# Altium PCB real_watch_1v1_main.PcbDoc
Units mil, origin at the board's own origin, x right, y up, seen from the top; angles counter-clockwise.
Board outline 1574.8 x 1574.8 mil, 2 copper layers (Top Layer, Bottom Layer), stack 22.8 mil thick; 41 components, 38 nets, 196 pads, 101 vias.
Unrouted connection lines stored in the file: 10.
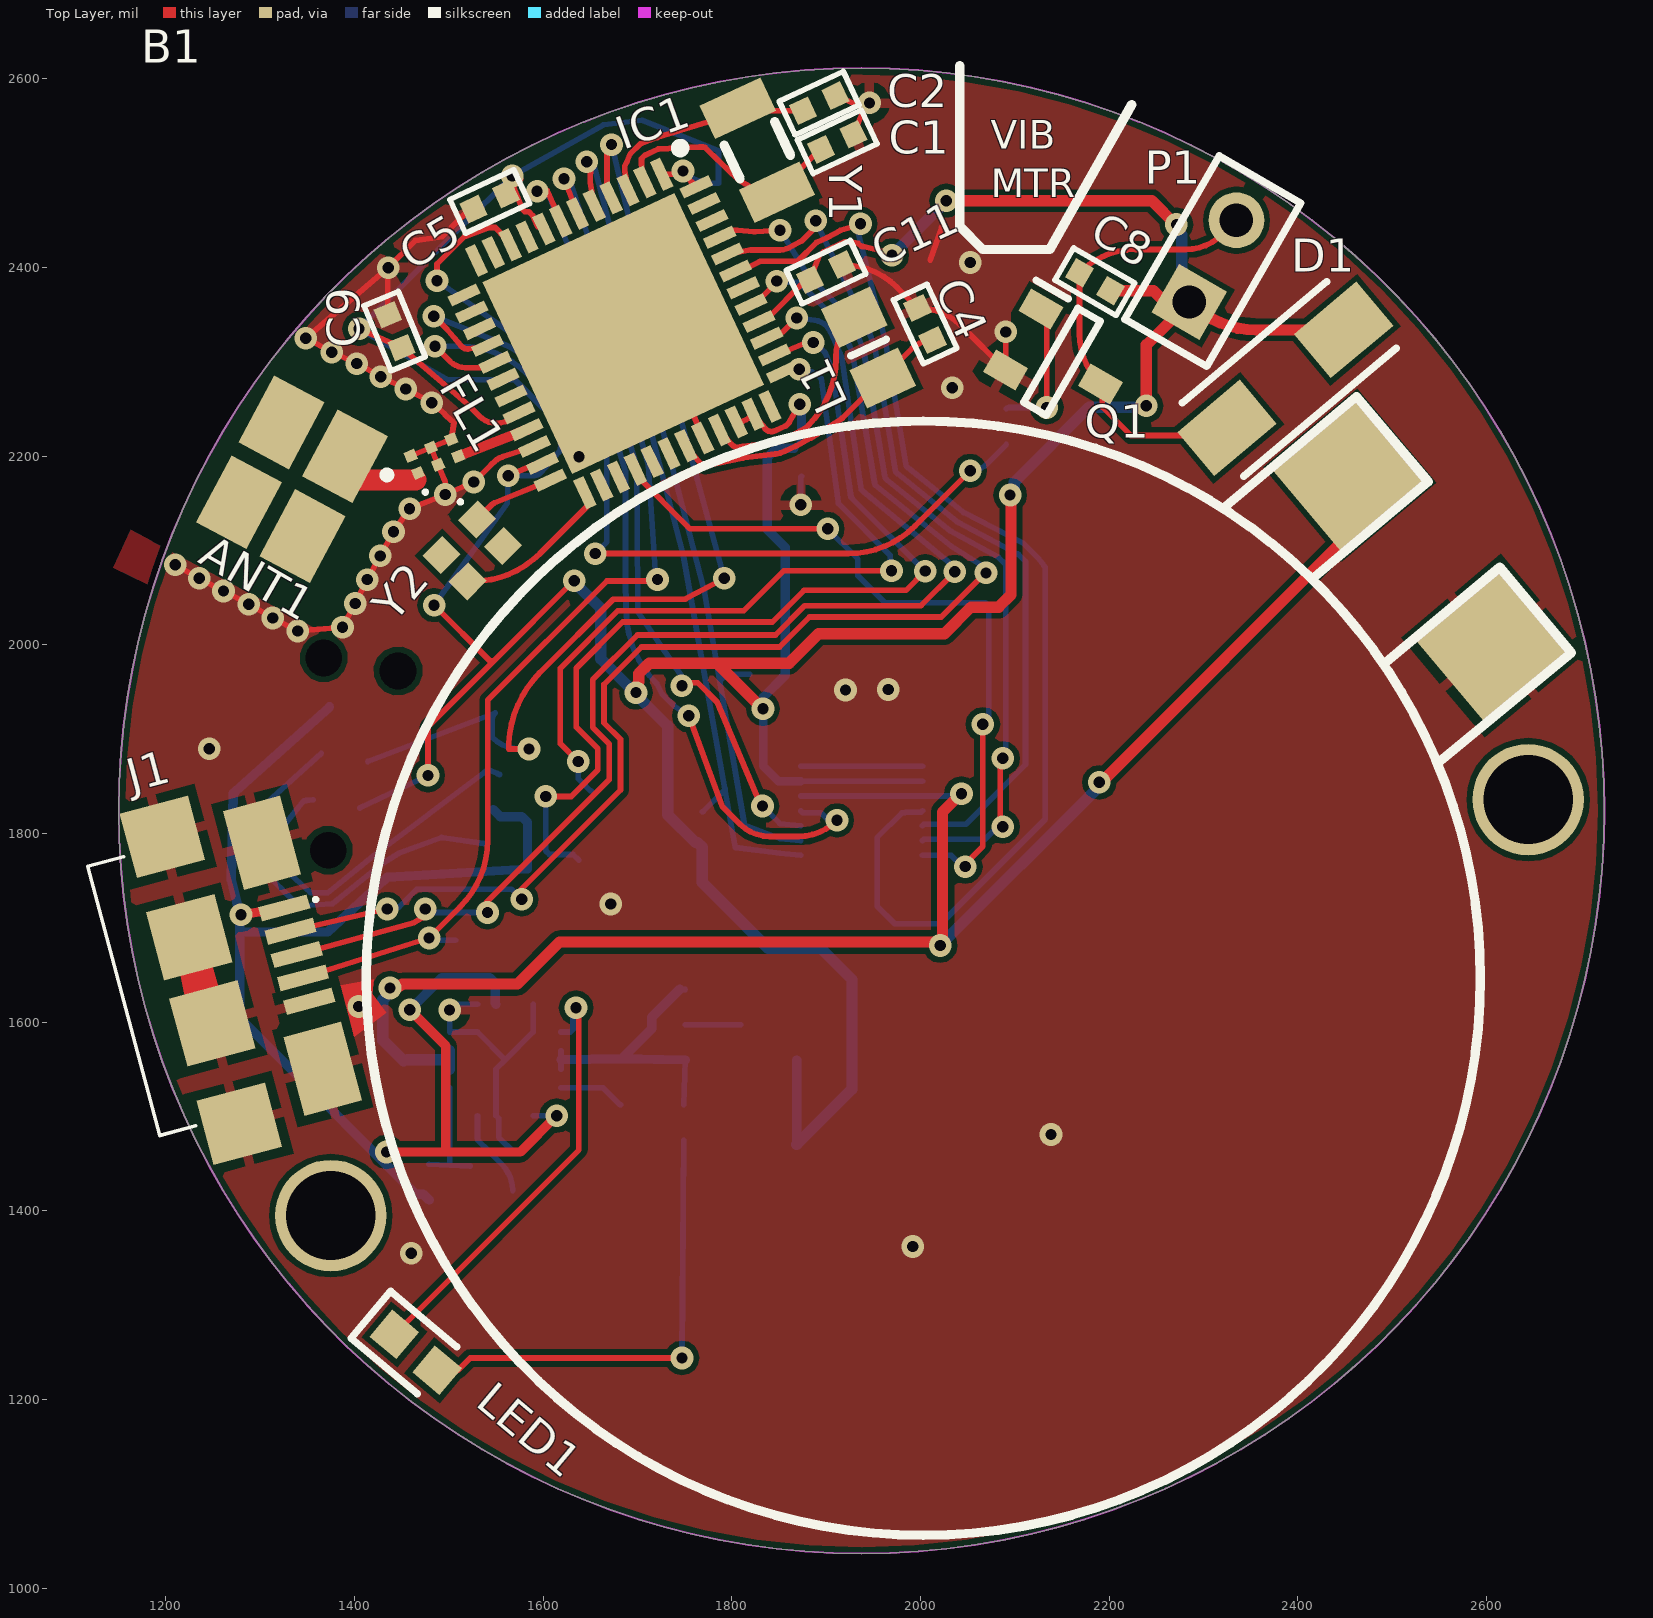
[diagram p0: Top Layer view]
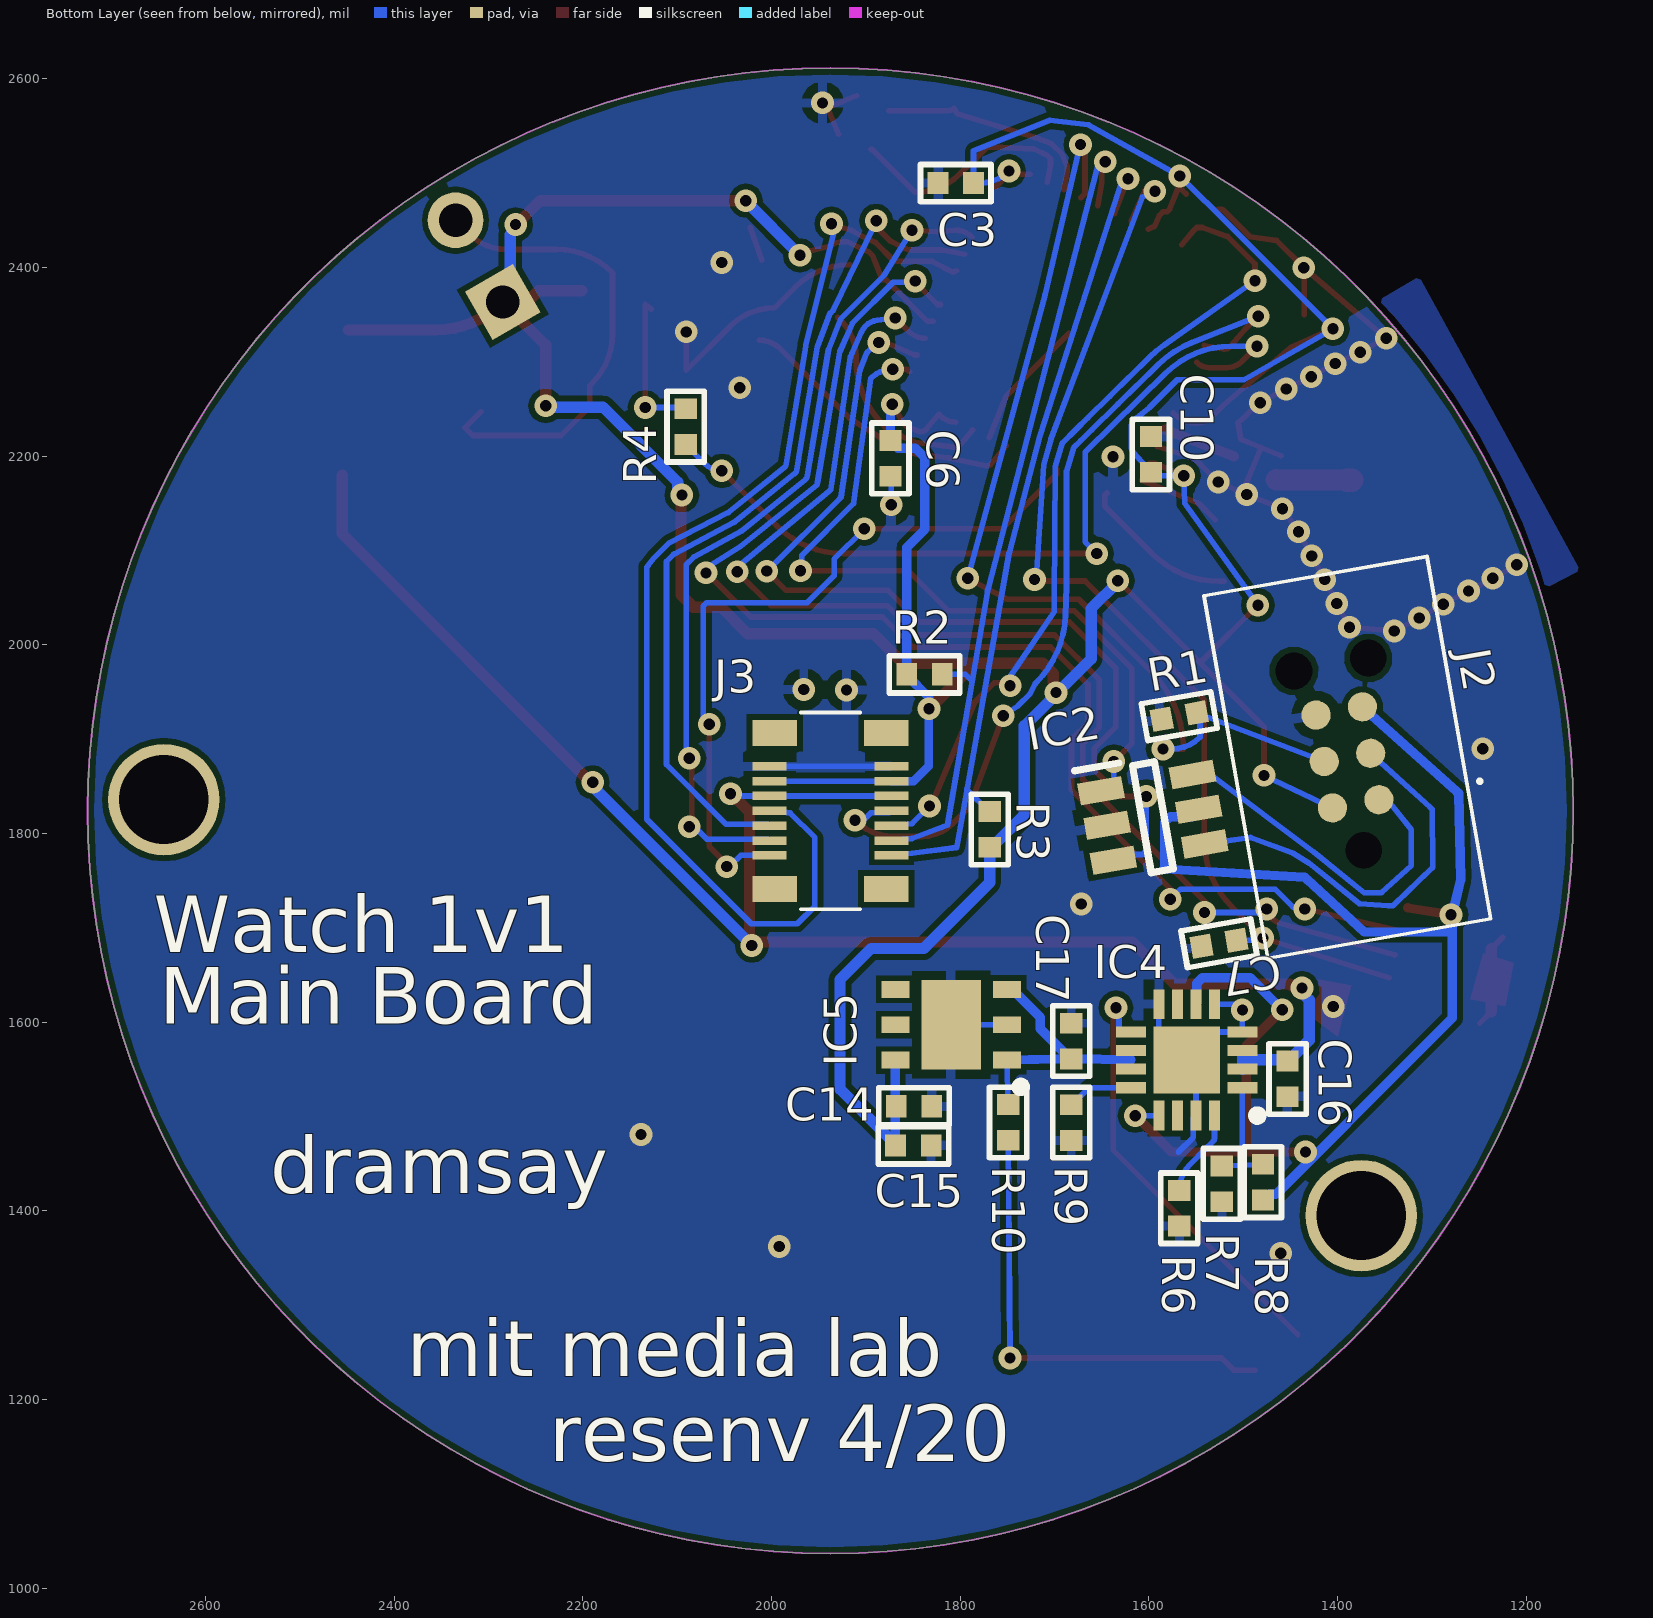
[diagram p1: Bottom Layer view, seen from below]
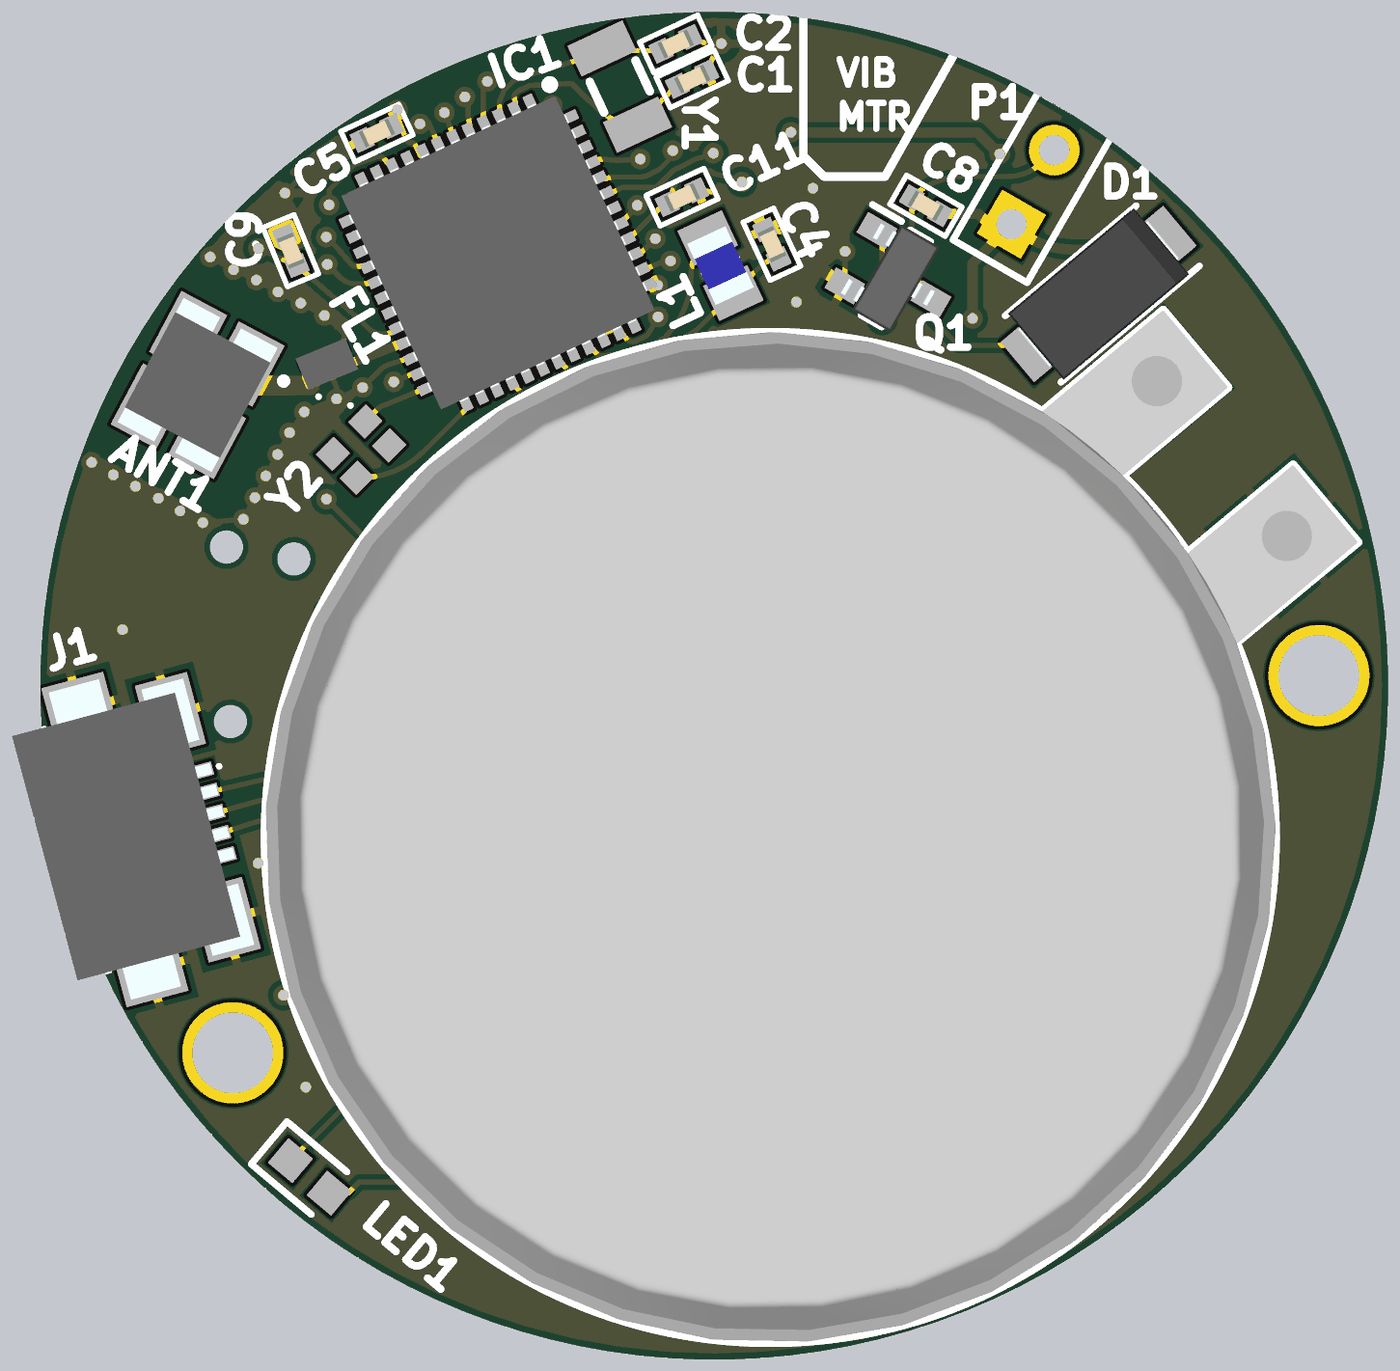
[diagram p2: 3D render of the assembled board from above, using the file's embedded part models]
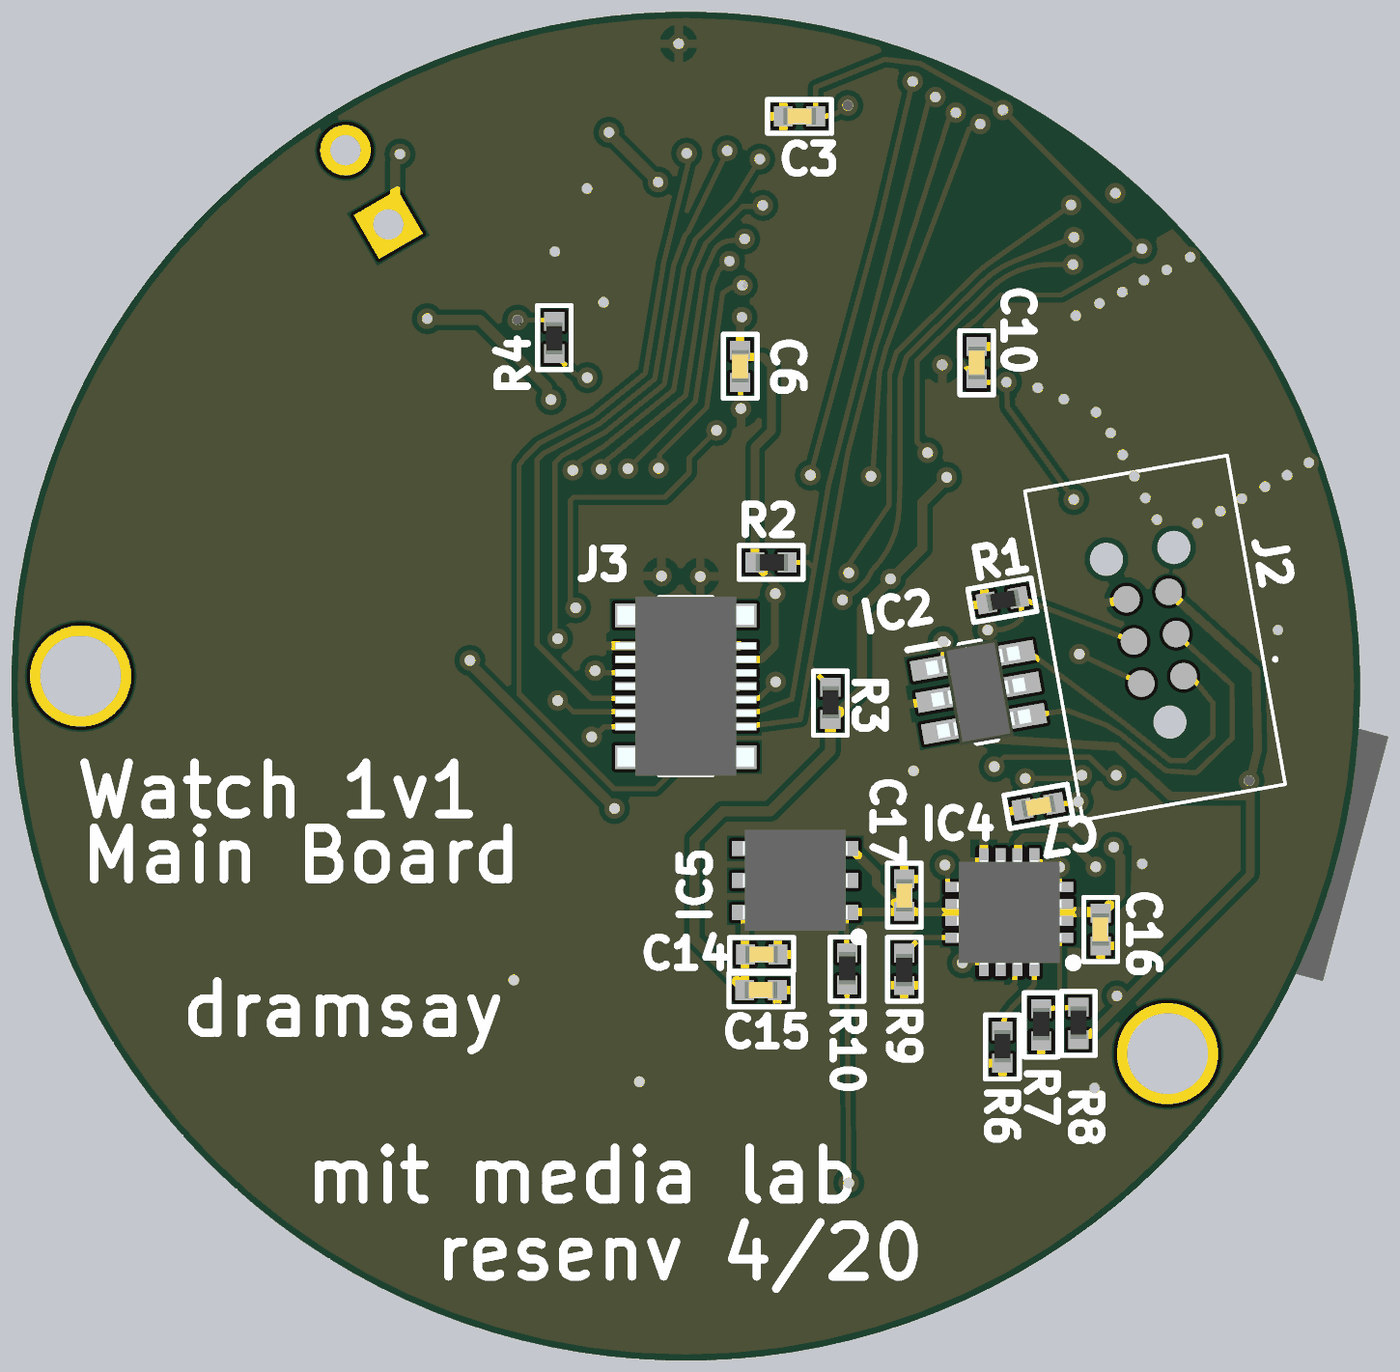
[diagram p3: 3D render of the assembled board from below, using the file's embedded part models]

## Layer stack, top to bottom
Top Solder: solder mask 0.4, Solder Resist, Dk 3.5
Top Layer: signal copper 1.4
Dielectric 1: dielectric 20, FR-4, Dk 4.8
Bottom Layer: signal copper 1.4
Bottom Solder: solder mask 0.4, Solder Resist, Dk 3.5

## Board outline
1937.65,1036.61 cw(c1937.65,1824.01) 1150.25,1824.01 cw(c1937.65,1824.01) 1937.65,2611.41 cw(c1937.65,1824.01) 2725.05,1824.01 cw(c1937.65,1824.01)

## Design rules (kind name [scope] priority, off if disabled: settings)
Clearance [All] p1: gap=6 ignorepadtopadclearanceinfootprint=FALSE except(0: Arc-Hole Track-Hole SMDPad-Hole THPad-Hole Via-Hole Fill-Hole Poly-Hole Region-Hole Text-Hole)
ComponentClearance [All] p1: gap=6 collisioncheckmode=3 verticalgap=6 showdistances=FALSE
MinimumSolderMaskSliver [All] p1: minsoldermaskwidth=6
PolygonConnect [All] p1: connectstyle=Direct reliefconductorwidth=10 reliefentries=4 polygonreliefangle="90 Angle" airgapwidth=10
RoutingVias [All] p1: holewidth=28 width=50 viastyle="Through Hole" minholewidth=28 minwidth=50 maxholewidth=28 maxwidth=50
SilkToSilkClearance [All] p1: silktosilkclearance=0
SilkToSolderMaskClearance [IsPad] p1: minsilkscreentomaskgap=3 clearancetoexposedcopper=TRUE
SolderMaskExpansion [All] p1: expansion=4 istentingtop=FALSE
Width [All] p1: maxlimit=100 minlimit=6 preferedwidth=6 minimp=50.000000 maximp=50.000000 favimp=50.000000
26 further rules are at their usual default settings.

## Classes and differential pairs
component class main_board_power: B1 C14 C15 C16 C17 IC2 IC3 IC4 IC5 J1 J2 LED1 R6 R7 R8 R9 R10
component class main_board_mcu: ANT1 C1 C2 C3 C4 C5 C6 C7 C8 C9 C10 C11 D1 FL1 IC1 J3 L1 P1 Q1 R1 R2 R3 R4 Y1 Y2

## Components (designator, comment, footprint, x,y, rotation, side; value= is the part's Value field where it differs from the comment)
ANT1 "0479480001" 0479480001 1333.94,2175.5 r332 top
B1 "300 mAh lipo" RJD3048ST1 2003.13,1646.66 r130 top locked
C1 "15pF" 0402C 1911.89,2533.13 r25 top
C2 "15pF" 0402C 1892.67,2574.16 r25 top
C3 "0.10µF" 0402C 1804.82,2489.42 r0 bottom
C4 "4.7µF" 0402C 2005,2340 r115 top
C5 "0.10µF" 0402C 1543.43,2469.83 r205 top
C6 "0.10µF" 0402C 1874,2197.67 r270 bottom
C7 "0.10µF" 0402C 1525.77,1683.7 r350 bottom
C8 "Cap" 0402C 2185,2385 r330 top value=1uF
C9 "0.10µF" 0402C 1442.77,2332.46 r112.5 top
C10 "0.10µF" 0402C 1597.87,2201.77 r90 bottom
C11 "100pF" 0402C 1900,2395 r25 top
C14 "Cap" 0402C 1849.1,1510.82 r180 bottom value=4.7uF
C15 "Cap" 0402C 1849.7,1469.32 r180 bottom value=10nF
C16 "Cap" 0402C 1453.1,1539.87 r270 bottom value=10uF
C17 "Cap" 0402C 1682.4,1579.92 r90 bottom value=10uF
D1 "STTH112A" DIOM5126X265N 2386.83,2281.88 r220 top
FL1 "MLPF-WB55-01E3" MLPFWB5501E3 1485,2200 r112.5 top
IC1 "STM32WB55CGU6" QFN50P700X700X65-49N-D 1685,2330 r295 top
IC2 "USBLC6-2SC6" SOT95P280X145-6N 1595.83,1817.13 r170 bottom
IC4 "BQ24075TRGTR" QFN50P300X300X100-17N-D 1560,1560 r0 bottom
IC5 "MAX4837ETT33BD3+T" SON95P300X300X80-7N 1809.73,1597.25 r0 bottom
J1 "ZX62-B-5PA(33)" ZX62B5PA33 1264.8,1651.75 r285 top
J2 "TC2030-CTX-NL" TC2030MCPNL10 1381.83,1882.03 r80 bottom
J3 "AXT514124" AXT514124 1937.65,1824.01 r90 bottom locked
L1 "LBR2012T100K" INDC2012X145N 1945,2315 r295 top
LED1 "150060VS75000" LEDC1608X80N 1465,1250 r320 top
P1 "To Vibration Motor" HDR1X2 2285,2363.4 r60 top
Q1 "MMBT2222A" SOT95P240X120-3N 2150,2300 r330 top
R1 "100k" 0402R 1567.88,1924.44 r170 bottom
R2 "10k" 0402R 1837.97,1968.64 r180 bottom
R3 "10k" 0402R 1768.75,1804.26 r90 bottom
R4 "1k" 0402R 2091.15,2231.2 r270 bottom
R6 "750" 0402R 1567.86,1402.72 r90 bottom
R7 "50k" 0402R 1522.72,1428.61 r90 bottom
R8 "200k" 0402R 1479.17,1430.34 r90 bottom
R9 "1.62k" 0402R 1682.4,1493.51 r270 bottom
R10 "1.5k" 0402R 1749.29,1493.69 r90 bottom
Y1 "NX3215SA-32.768K-STD-MUA-8" NX3215SA 1827.24,2524.26 r115 top
Y2 "XRCGB32M000F1H01R0" XRCGB32M000F1H01R0 1525,2100 r225 top

## Footprints (in the part's own frame and the unit in brackets; to place one, negate y for a bottom-side part, rotate by r counter-clockwise, add the part's x,y. Pads: shape width x height; smd on the part's side, far side on the other; paste and mask are expansions set on the pad)
0402C [mm]
  rect 0.559x0.6 smd: 1(-0.48,0) 2(0.48,0)
  silkscreen extent -0.95,-0.5 0.95,0.5, body extent -0.48,-0.25 0.48,0.25, height 0.5
0402R [mm]
  rect 0.559x0.6 smd: 1(-0.48,0) 2(0.48,0)
  silkscreen extent -0.95,-0.5 0.95,0.5, body extent -0.46,-0.25 0.5,0.25, height 0.3
0479480001 [mm]
  rect 1.54x2.045 smd: 1(0.965,1.218) SP1(-0.965,1.218) SP2(-0.965,-1.218) SP3(0.965,-1.218)
  silkscreen extent 2.1,1.2 2.3,1.4, body extent -1.6,-2.09 1.6,2.09, height 4.1
AXT514124 [mm]
  rect 0.23x0.92 smd: 1(-1.2,-1.64) 2(-1.2,1.64) 3(-0.8,-1.64) 4(-0.8,1.64) 5(-0.4,-1.64) 6(-0.4,1.64) 7(0,-1.64) 8(0,1.64) 9(0.4,-1.64) 10(0.4,1.64) 11(0.8,-1.64) 12(0.8,1.64) 13(1.2,-1.64) 14(1.2,1.64)
  rect 0.7x1.2 smd: MP1(-2.1,-1.5) MP2(-2.1,1.5) MP3(2.1,-1.5) MP4(2.1,1.5)
  silkscreen extent -2.65,-0.8 2.65,0.8, body extent -2.65,-2.08 2.65,2.08, height 1.27
DIOM5126X265N [mm]
  rect 2.2x1.55 smd: 1(-2.05,0) 2(2.05,0)
  silkscreen extent -2.82,-1.29 2.54,1.29, body extent -2.54,-1.29 2.54,1.29, height 2.65
HDR1X2 [mm] "Connector; Header; 2 Position"
  rect 1.5x1.5 hole 0.9: 1(0,0)
  round 1.5 hole 0.9: 2(2.54,0)
  silkscreen extent -1.27,-1.27 3.81,1.27
INDC2012X145N [mm]
  rect 1.15x1.45 smd: 1(-0.9,0) 2(0.9,0)
  silkscreen extent 0,-0.52 0,0.52, body extent -1,-0.63 1,0.63, height 1.45
LEDC1608X80N [mm]
  rect 0.95x0.95 smd: 1(-0.75,0) 2(0.75,0)
  silkscreen extent -1.58,-0.82 0.75,0.83
MLPFWB5501E3 [mm]
  rect 0.3x0.3 smd: 1(-0.25,0.587) 2(-0.25,0) 3(-0.25,-0.587) 4(0.25,-0.587) 5(0.25,0) 6(0.25,0.587)
  silkscreen extent -0.85,0.55 -0.75,0.65, body extent -0.5,-0.8 0.5,0.8, height 0.8
NX3215SA [mm]
  rect 1x1.8 smd: 1(-1.25,0) 2(1.25,0)
  silkscreen extent -0.5,-0.75 0.5,0.75
QFN50P300X300X100-17N-D [mm]
  rect 0.8x0.3 smd: 1(-1.5,0.75) 2(-1.5,0.25) 3(-1.5,-0.25) 4(-1.5,-0.75) 9(1.5,-0.75) 10(1.5,-0.25) 11(1.5,0.25) 12(1.5,0.75)
  rect 0.3x0.8 smd: 5(-0.75,-1.5) 6(-0.25,-1.5) 7(0.25,-1.5) 8(0.75,-1.5) 13(0.75,1.5) 14(0.25,1.5) 15(-0.25,1.5) 16(-0.75,1.5)
  rect 1.8x1.8 smd: 17(0,0)
  silkscreen extent -2.02,1.38 -1.77,1.62, body extent -1.55,-1.55 1.55,1.55, height 1
QFN50P700X700X65-49N-D [mm]
  rect 0.85x0.3 smd: 1(-3.45,2.75) 2(-3.45,2.25) 3(-3.45,1.75) 4(-3.45,1.25) 5(-3.45,0.75) 6(-3.45,0.25) 7(-3.45,-0.25) 8(-3.45,-0.75) 9(-3.45,-1.25) 10(-3.45,-1.75) 11(-3.45,-2.25) 12(-3.45,-2.75) 25(3.45,-2.75) 26(3.45,-2.25) 27(3.45,-1.75) 28(3.45,-1.25) 29(3.45,-0.75) 30(3.45,-0.25) 31(3.45,0.25) 32(3.45,0.75) 33(3.45,1.25) 34(3.45,1.75) 35(3.45,2.25) 36(3.45,2.75)
  rect 0.3x0.85 smd: 13(-2.75,-3.45) 14(-2.25,-3.45) 15(-1.75,-3.45) 16(-1.25,-3.45) 17(-0.75,-3.45) 18(-0.25,-3.45) 19(0.25,-3.45) 20(0.75,-3.45) 21(1.25,-3.45) 22(1.75,-3.45) 23(2.25,-3.45) 24(2.75,-3.45) 37(2.75,3.45) 38(2.25,3.45) 39(1.75,3.45) 40(1.25,3.45) 41(0.75,3.45) 42(0.25,3.45) 43(-0.25,3.45) 44(-0.75,3.45) 45(-1.25,3.45) 46(-1.75,3.45) 47(-2.25,3.45) 48(-2.75,3.45)
  rect 5.7x5.7 smd: 49(0,0)
  silkscreen extent -4,3.38 -3.75,3.62, body extent -3.55,-3.55 3.55,3.55, height 0.65
RJD3048ST1 [mm] "Illinois Capacitor 300mAh Lipo Battery"
  rect 3x3 smd: Neg(-3,-17.5) Pos(3,-17.5)
  silkscreen extent -15,-19 15,15, body extent -15,-19 15,15, height 4.8
SON95P300X300X80-7N [mm]
  rect 0.75x0.45 smd: 1(-1.5,0.95) 2(-1.5,0) 3(-1.5,-0.95) 4(1.5,-0.95) 5(1.5,0) 6(1.5,0.95)
  rect 1.6x2.4 smd: 7(0,0)
  silkscreen extent -2,1.55 -1.75,1.8, body extent -1.55,-1.5 1.55,1.5, height 0.8
SOT95P240X120-3N [mm]
  rect 1x0.7 smd: 1(-1.2,0.95) 2(-1.2,-0.95) 3(1.2,0)
  silkscreen extent -1.7,-1.46 0.35,1.55, body extent -1.2,-1.46 1.2,1.46, height 1.2
SOT95P280X145-6N [mm]
  rect 1.2x0.6 smd: 1(-1.25,0.95) 2(-1.25,0) 3(-1.25,-0.95) 4(1.25,-0.95) 5(1.25,0) 6(1.25,0.95)
  silkscreen extent -1.85,-1.46 0.3,1.6, body extent -1.4,-1.46 1.4,1.46, height 1.45
TC2030MCPNL10 [mm]
  round 0.787 smd: 1(-1.27,-0.434) 2(-1.27,0.836) 3(0,-0.434) 4(0,0.836) 5(1.27,-0.434) 6(1.27,0.836)
  round 0.495 hole 0.991 unplated: 7(-2.54,0.201) 8(2.54,1.217) 9(2.54,-0.815)
  silkscreen extent -4.95,-3.25 4.95,3.25
XRCGB32M000F1H01R0 [mm]
  rect 0.75x0.7 smd: 1(-0.675,-0.5) 2(0.675,-0.5) 3(0.675,0.5) 4(-0.675,0.5)
  silkscreen extent -0.75,-1.2 -0.65,-1.1
ZX62B5PA33 [mm]
  rect 0.4x1.35 smd: 1(-1.3,1.95) 2(-0.65,1.95) 3(0,1.95) 4(0.65,1.95) 5(1.3,1.95)
  rect 2.2x1.6 smd: 6(-3.15,1.825) 7(3.15,1.825)
  rect 1.8x1.9 smd: 8(-4,-0.725) 11(4,-0.725)
  rect 1.9x1.9 smd: 9(-1.2,-0.725) 10(1.2,-0.725)
  silkscreen extent -3.75,-2.88 3.75,2.87, body extent -4.72,-2.88 4.72,2.59, height 2.9

## Part data
ANT1: "Antenna", Manufacturer_Name=Molex, Datasheet Link=https://www.molex.com/pdm_docs/sd/479480001_sd.pdf, Height=4mm, Manufacturer_Part_Number=0479480001
B1: library part RJD3048ST1, "Illinois Capacitor 300mAh Lipo Battery"
C1 C2: library part GCM1555C1H150JA16D, "CAP CER 15PF 50V NP0 0402", Digi-Key Part Number=490-11147-1-ND, Manufacturer="Murata Electronics North America", Operating Temperature="-55°C ~ 125°C", Package / Case="0402 (1005 Metric)", Ratings=AEC-Q200, Temperature Coefficient="C0G, NP0", Tolerance=±5%, Voltage=50V, @ qty=0, Applications=Automotive, Datasheets=http://www.murata.com/~/media/webrenewal/support/library/catalog/products/capacitor/mlcc/c03e.ashx, Factory Stock=0, Features=-, Height - Seated (Max)=-, Image=//media.digikey.com/Renders/Murata%20Renders/ZRB-SERIES-0402.jpg, Lead Spacing=-, Lead Style=-, Minimum Quantity=1, Mounting Type="Surface Mount, MLCC", Packaging="Cut Tape (CT)", Part Number=GCM1555C1H150JA16D, Part Status=Active, Quantity Available=6185, Series=GCM, Size / Dimension="0.039\" L x 0.020\" W (1.00mm x 0.50mm)", Thickness (Max)="0.022\" (0.55mm)", Unit Price (USD)=0.1
C3 C5 C6 C7 C9 C10: library part GCM155R71C104KA55D, "CAP CER 0.1UF 16V X7R 0402", Digi-Key Part Number=490-4759-1-ND, Manufacturer="Murata Electronics North America", Operating Temperature="-55°C ~ 125°C", Package / Case="0402 (1005 Metric)", Ratings=AEC-Q200, Temperature Coefficient=X7R, Tolerance=±10%, Voltage=16V, @ qty=0, Applications=Automotive, Datasheets=http://www.murata.com/~/media/webrenewal/support/library/catalog/products/capacitor/mlcc/c03e.ashx, Factory Stock=0, Features=-, Height - Seated (Max)=-, Image=//media.digikey.com/Renders/Murata%20Renders/ZRB-SERIES-0402.jpg, Lead Spacing=-, Lead Style=-, Minimum Quantity=1, Mounting Type="Surface Mount, MLCC", Packaging="Cut Tape (CT)", Part Number=GCM155R71C104KA55D, Part Status=Active, Quantity Available=734194, Series=GCM, Size / Dimension="0.039\" L x 0.020\" W (1.00mm x 0.50mm)", Thickness (Max)="0.022\" (0.55mm)", Unit Price (USD)=0.1
C4: library part GRM153R60G475ME15D, "CAP CER 4.7UF 4V X5R 0402", Digi-Key Part Number=490-13231-1-ND, Manufacturer="Murata Electronics North America", Operating Temperature="-55°C ~ 85°C", Package / Case="0402 (1005 Metric)", Ratings=-, Temperature Coefficient=X5R, Tolerance=±20%, Voltage=4V, @ qty=0, Applications="General Purpose", Datasheets=http://psearch.en.murata.com/capacitor/product/GRM153R60G475ME15%23.pdf, Factory Stock=0, Features=-, Height - Seated (Max)=-, Image=//media.digikey.com/Renders/Murata%20Renders/ZRB-SERIES-0402.jpg, Lead Spacing=-, Lead Style=-, Minimum Quantity=1, Mounting Type="Surface Mount, MLCC", Packaging="Cut Tape (CT)", Part Number=GRM153R60G475ME15D, Part Status=Active, Quantity Available=9100, Series=GRM, Size / Dimension="0.039\" L x 0.020\" W (1.00mm x 0.50mm)", Thickness (Max)="0.013\" (0.33mm)", Unit Price (USD)=0.27
C8 C14 C15 C16 C17: "Capacitor", LatestRevisionDate=17-Jul-2002, LatestRevisionNote="Re-released for DXP Platform.", PackageDescription="Radial Cap, Thru-Hole; 2 Leads; 0.3 in Pin Spacing", PackageReference=RAD-0.3, Published=8-Jun-2000, Publisher="Altium Limited"
C11: library part GCM1555C1H101JA16D, "CAP CER 100PF 50V NP0 0402", Digi-Key Part Number=490-10669-1-ND, Manufacturer="Murata Electronics North America", Operating Temperature="-55°C ~ 125°C", Package / Case="0402 (1005 Metric)", Ratings=AEC-Q200, Temperature Coefficient="C0G, NP0", Tolerance=±5%, Voltage=50V, @ qty=0, Applications=Automotive, Datasheets=http://www.murata.com/~/media/webrenewal/support/library/catalog/products/capacitor/mlcc/c03e.ashx, Factory Stock=0, Features=-, Height - Seated (Max)=-, Image=//media.digikey.com/Renders/Murata%20Renders/ZRB-SERIES-0402.jpg, Lead Spacing=-, Lead Style=-, Minimum Quantity=1, Mounting Type="Surface Mount, MLCC", Packaging="Cut Tape (CT)", Part Number=GCM1555C1H101JA16D, Part Status=Active, Quantity Available=61397, Series=GCM, Size / Dimension="0.039\" L x 0.020\" W (1.00mm x 0.50mm)", Thickness (Max)="0.022\" (0.55mm)", Unit Price (USD)=0.1
D1: "Diode", Manufacturer_Name=STMicroelectronics, Mouser Part Number=511-STTH112A, RS Part Number=0249319, Allied Price/Stock=http://www.alliedelec.com/stmicroelectronics-stth112a/70391556/, Allied_Number=70391556, Datasheet Link=http://www.st.com/web/en/resource/technical/document/datasheet/CD00003260.pdf, Height=2.65mm, Manufacturer_Part_Number=STTH112A, Mouser Price/Stock=https://www.mouser.com/Search/Refine.aspx?Keyword=511-STTH112A, RS Price/Stock=http://uk.rs-online.com/web/p/products/0249319
FL1: "Filter", Manufacturer_Name=STMicroelectronics, Mouser Part Number=511-MLPF-WB55-01E3, RS Part Number=1924203, Datasheet Link=https://www.st.com/resource/en/datasheet/mlpf-wb55-01e3.pdf, Height=0.7mm, Manufacturer_Part_Number=MLPF-WB55-01E3, Mouser Price/Stock=https://www.mouser.com/Search/Refine.aspx?Keyword=511-MLPF-WB55-01E3, RS Price/Stock=http://uk.rs-online.com/web/p/products/1924203
IC1: "Integrated Circuit", Manufacturer_Name=STMicroelectronics, Mouser Part Number=511-STM32WB55CGU6, Datasheet Link=https://www.st.com/en/microcontrollers/stm32wb55cg.html, Height=0.65mm, Manufacturer_Part_Number=STM32WB55CGU6, Mouser Price/Stock=https://www.mouser.com/Search/Refine.aspx?Keyword=511-STM32WB55CGU6
IC2: "Integrated Circuit", Manufacturer_Name=STMicroelectronics, Mouser Part Number=511-USBLC6-2SC6, RS Part Number=9206266, Allied Price/Stock=http://www.alliedelec.com/stmicroelectronics-usblc6-2sc6/70389689/, Allied_Number=70389689, Datasheet Link=http://www.st.com/st-web-ui/static/active/en/resource/technical/document/datasheet/CD00050750.pdf, Height=1.45mm, Manufacturer_Part_Number=USBLC6-2SC6, Mouser Price/Stock=https://www.mouser.com/Search/Refine.aspx?Keyword=511-USBLC6-2SC6, RS Price/Stock=https://uk.rs-online.com/web/p/products/9206266
IC4: "Integrated Circuit", Manufacturer_Name="Texas Instruments", Mouser Part Number=595-BQ24075TRGTR, Datasheet Link=http://componentsearchengine.com/Datasheets/1/BQ24075TRGTR.pdf, Height=1mm, Manufacturer_Part_Number=BQ24075TRGTR, Mouser Price/Stock=https://www.mouser.com/Search/Refine.aspx?Keyword=595-BQ24075TRGTR
IC5: "Integrated Circuit", Manufacturer_Name="Maxim Integrated", Datasheet Link=https://datasheets.maximintegrated.com/en/ds/MAX4836-MAX4837.pdf, Height=0.8mm, Manufacturer_Part_Number=MAX4837ETT33BD3+T
J1: "Connector", Manufacturer_Name=Hirose, Mouser Part Number=798-ZX62-B-5PA33, RS Part Number=1362267, Datasheet Link=http://www.mouser.com/ds/2/185/ZX_catalog-939768.pdf, Height=2.8mm, Manufacturer_Part_Number=ZX62-B-5PA(33), Mouser Price/Stock=https://www.mouser.com/Search/Refine.aspx?Keyword=798-ZX62-B-5PA33, RS Price/Stock=http://uk.rs-online.com/web/p/products/1362267
J2: "Connector", Manufacturer_Name="Tag Connect", Datasheet Link=http://www.tag-connect.com/Materials/TC2030-CTX.pdf, Height=18mm, Manufacturer_Part_Number=TC2030-CTX-NL
J3: "Connector", Manufacturer_Name=Panasonic, Mouser Part Number=769-AXT514124, Datasheet Link=https://componentsearchengine.com/Datasheets/1/AXT514124.pdf, Height=1.17mm, Manufacturer_Part_Number=AXT514124, Mouser Price/Stock=https://www.mouser.com/Search/Refine.aspx?Keyword=769-AXT514124
L1: "Inductor", Manufacturer_Name="TAIYO YUDEN", Mouser Part Number=963-LBR2012T100K, Datasheet Link=https://componentsearchengine.com/Datasheets/2/LBR2012T100K.pdf, Height=1.45mm, Manufacturer_Part_Number=LBR2012T100K, Mouser Price/Stock=https://www.mouser.com/Search/Refine.aspx?Keyword=963-LBR2012T100K
LED1: "LED", Manufacturer_Name="Wurth Elektronik", Mouser Part Number=710-150060VS75000, RS Part Number=8154215P, Datasheet Link=http://docs-emea.rs-online.com/webdocs/1302/0900766b81302e1e.pdf, Height=0.8mm, Manufacturer_Part_Number=150060VS75000, Mouser Price/Stock=https://www.mouser.com/Search/Refine.aspx?Keyword=710-150060VS75000, RS Price/Stock=http://uk.rs-online.com/web/p/products/8154215P
P1: library part "Header 2", "Header, 2-Pin", LatestRevisionDate=17-Jul-2002, LatestRevisionNote="Re-released for DXP Platform.", Publisher="Altium Limited"
Q1: "Transistor BJT NPN", Manufacturer_Name="ON Semiconductor", Mouser Part Number=512-MMBT2222A, RS Part Number=7390350P, Datasheet Link=https://www.onsemi.com/pub/Collateral/PZT2222A-D.pdf, Height=1.2mm, Manufacturer_Part_Number=MMBT2222A, Mouser Price/Stock=https://www.mouser.com/Search/Refine.aspx?Keyword=512-MMBT2222A, RS Price/Stock=http://uk.rs-online.com/web/p/products/7390350P
R1: library part ERJ-2RKF1003X, "RES SMD 100K OHM 1% 1/10W 0402", Digi-Key Part Number=P100KLCT-ND, Manufacturer="Panasonic Electronic Components", Operating Temperature="-55°C ~ 155°C", Package / Case="0402 (1005 Metric)", Power (Watts)="0.1W, 1/10W", Supplier Device Package=0402, Temperature Coefficient=±100ppm/°C, Tolerance=±1%, @ qty=1500, Composition="Thick Film", Datasheets=http://industrial.panasonic.com/www-cgi/jvcr13pz.cgi?E+PZ+3+AOA0002+ERJ2RKF1003X+7+WW, Factory Stock=0, Failure Rate=-, Features="Automotive AEC-Q200", Height - Seated (Max)="0.016\" (0.40mm)", Image=//media.digikey.com/Photos/Panasonic%20Photos/ERJ-PA2-Series.jpg, Minimum Quantity=1, Number of Terminations=2, Packaging="Cut Tape (CT)", Part Number=ERJ-2RKF1003X, Part Status=Active, Quantity Available=2645965, Series=ERJ, Size / Dimension="0.039\" L x 0.020\" W (1.00mm x 0.50mm)", Unit Price (USD)=0.00496
R2 R3 R4 R6 R7 R8 R9 R10: library part Resistor
Y1: "Crystal or Oscillator", Manufacturer_Name=NDK, Mouser Part Number=344-NX3215SA32768K8, Datasheet Link=http://www.ndk.com/images/products/catalog/c_NX3215SA-STD-MUA-14_e.pdf, Manufacturer_Part_Number=NX3215SA-32.768K-STD-MUA-8, Mouser Price/Stock=https://www.mouser.com/Search/Refine.aspx?Keyword=344-NX3215SA32768K8
Y2: "Crystal or Oscillator", Manufacturer_Name="Murata Electronics", Mouser Part Number=81-XRCGB32M000F1H01R, Datasheet Link=https://www.murata.com/en-eu/products/productdetail?partno=XRCGB32M000F1H01R0, Height=0.7mm, Manufacturer_Part_Number=XRCGB32M000F1H01R0, Mouser Price/Stock=https://www.mouser.com/Search/Refine.aspx?Keyword=81-XRCGB32M000F1H01R

## Free pads (board coordinates)
  round 118.11 hole 94.49: 13(1375,1395) 13(2644.29,1835.93)

## Via types
v1: diameter 24, hole 12, Top Layer to Bottom Layer, tented both sides, 101 vias

## Nets (pads, with @x,y where several pads share a name; then routed paths per layer and width w, separated by ;. In a path a pad name is that pad's centre, name@x,y a point inside that pad or via, vN(x,y) a via of type N, cw(c..) or ccw(c..) an arc to the next point about the centre after c; other vN are vias at no path point)
5V: IC2.5 IC4.6 IC4.13 J1.1 J2.5 R8.1 | length 1641.5
  Top Layer w10: v1(1279.83,1713.82) J1.1 ; v1(1434.13,1462.37) 1497.1,1462.37 ; v1(1458.84,1613.14) 1458.84,1612.96 1497.1,1574.7 1497.1,1462.37 ; v1(1614.58,1500.94) 1576,1462.37 1497.1,1462.37
  Bottom Layer w6: 1269.67,1750.6 1269.67,1751.38 1269.68,1751.45 ; 1271.76,1842.41 1273.57,1844.22 1273.69,1844.33 ; IC2.5@1547.36,1825.24 IC2.5 ; IC4.13 v1(1614.58,1500.94) v1@1615.36,1501.73
  Bottom Layer w10: 1269.67,1750.6 1278.52,1713.78 1278.52,1695.58 ; 1269.68,1751.45 1271.76,1842.41 ; 1273.69,1844.33 J2.5 ; v1(1458.84,1613.14) 1492.89,1647.19 1543.39,1647.19 1549.25,1641.33 1549.25,1619.96 IC4.6 ; R8.1 1473.17,1417.45 1465.49,1417.45 1313.25,1569.69 1278.52,1604.41 1278.52,1653.52 1278.52,1695.58 ; IC2.5@1547.36,1825.24 1554.8,1817.8 1577.64,1817.8 1583.5,1811.94 1583.5,1762.35 1434.94,1753.44 1432.33,1751.06 1371.59,1695.58 1278.52,1695.58
BOOT0: IC1.4 J2.4 R1.2 | length 1097.1
  Top Layer w6: v1(1585.05,1889.62) 1563.61,1889.62 1563.61,1895.62 1563.61,1895.78 cw(c1678.49,1889.62) 1597.17,1970.99 1674.39,2048.21 1750.41,2048.21 1751.74,2048.92 v1(1792.09,2070.49) ; IC1.4 1667.73,2478.36 1667.73,2521.8 1667.73,2523.84 v1(1672.65,2530.24) v1@1675.19,2533.55
  Bottom Layer w6: J2.4 R1.2 ccw(c1557.33,1919.66) 1545.93,1919.66 1545.93,1901.86 ccw(c1575.48,1931.4) 1575.48,1889.62 v1(1585.05,1889.62) ; v1(1672.65,2530.24) 1710.04,2371.65 1710.12,2371.34 v1(1792.09,2070.49)
BTN1: IC1.43 J3.8 | length 1227.2
  Top Layer w6: IC1.43 1805.83,2395.73 1808.21,2394.99 1828.97,2405.87 1830.28,2406.55 1850.02,2406.55 1868.95,2406.55 1871.07,2407.66 1889.18,2425.76 1889.93,2426.51 1901.46,2431.88 1901.62,2431.97 1915.14,2439.34 1933.93,2444.81 1935.37,2445.23 v1(1936.56,2446.39)
  Bottom Layer w6: v1(1936.56,2446.39) 1936.35,2446.19 1936.35,2445.52 1933.52,2442.64 1933.52,2439.43 1933.69,2438.75 1963.73,2317.42 1964.37,2312.38 1964.39,2312.27 1964.72,2310.26 1984.53,2191.6 1984.85,2189.71 1986.43,2188.13 2044.87,2140.93 2045.3,2140.59 2046.11,2140.15 2108.9,2107.8 2125.09,2091.61 2131.12,2083.84 2131.39,2083.5 2132.38,2082.22 2132.38,1815.01 2021.64,1704.26 1972.84,1704.26 1954.18,1722.92 1954.18,1795.59 1980.38,1821.79 1983.59,1821.79 1984.28,1822.48 2000.69,1822.48 J3.8
BTN2: IC1.44 J3.6 | length 910.4
  Top Layer w6: IC1.44 1820.36,2418.55 1850.02,2418.55 1851.21,2418.55 ccw(c1851.21,2439.55) 1860.98,2420.97 ; 1861.02,2420.99 1873.98,2427.81 1889.31,2443.14 1889.31,2448.11 v1(1889.23,2449.35)
  Bottom Layer w6: v1(1889.23,2449.35) 1890.99,2444.82 1891.44,2443.92 1934.44,2355.35 1934.88,2354.44 1938.37,2350.96 1951.73,2315.24 1968.97,2211.38 1973.46,2185.1 1973.78,2183.22 1975.36,2181.65 2038.18,2130.91 2038.61,2130.57 2040.43,2129.58 2103.14,2096.22 2103.93,2095.8 2111.45,2088.27 2111.45,1873.04 2048.21,1809.79 2003.74,1809.79 J3.6
BTN3: IC1.45 J3.4 | length 891.1
  Top Layer w6: IC1.45 cw(c1805.53,2413.78) 1805.53,2439.55 cw(c1805.53,2433.55) 1806.11,2439.52 1823.39,2437.88 ccw(c1824.24,2446.84) 1824.82,2437.86 v1(1851.21,2439.55) ; v1(2087.23,1807.25) 2084.67,1809.8 2084.67,1877.02 v1(2087.23,1879.57)
  Bottom Layer w6: v1(1851.21,2439.55) 1880.44,2392.15 1880.8,2391.55 1926.37,2345.93 1939.73,2312.91 1951.9,2240.08 1962.39,2178.62 1962.71,2176.73 1964.29,2175.16 2031.49,2120.89 2031.92,2120.55 2082.27,2093.18 2090.57,2084.88 2090.57,1882.92 v1(2087.23,1879.57) ; J3.4 2003.67,1793.97 2068.73,1793.97 2082.01,1807.25 v1(2087.23,1807.25)
GND: B1.Neg C1.2 C2.2 C3.2 C4.2 C5.2 C6.2 C7.2 C9.2 C10.2 C11.2 C14.2 C15.2 C16.2 C17.2 FL1.2 FL1.4 FL1.5 FL1.6 IC1.22 IC1.32 IC1.49 IC2.2 IC4.4 IC4.5 IC4.8 IC4.15 IC4.17 IC5.2 IC5.7 J1.5 J1.6 J1.7 J1.8 J1.9 J1.10 J1.11 J2.6 J3.13 J3.14 Q1.2 R1.1 R6.1 R7.1 R9.2 | length 2192.4
  Top Layer w6: v1(1210,2085) v1(1235.46,2070.44) v1(1261.25,2057.01) v1(1288.11,2043.04) v1(1313.36,2028.35) v1(1340.05,2014.56) v1(1387.38,2018.55) v1(1400.87,2043.84) v1(1413.68,2069.13) v1(1427.42,2094.22) v1(1441.43,2119.8) v1(1458.54,2144.09) v1(1496.19,2159.24) ; J1.9 J1.9@1237.23,1677.77 ; J1.10@1237.23,1610.96 J1.10 ; C9.2 1435.54,2398.69 cw(c1437.11,2398.69) v1(1436,2399.8) ; FL1.6 FL1.5 ; C5.2 1523.5,2461.43 1521.54,2461.14 1493.14,2432.73 1464.73,2428.54 v1(1436,2399.8) ; IC1.22 1556.74,2199.12 ccw(c1563.15,2179.12) 1548.94,2194.59 1545.46,2191.4 ccw(c1549.5,2186.96) 1545.27,2191.21 v1(1526.66,2172.61) v1(1496.19,2159.24) ; IC1.49 1750.46,2264.54 cw(c1746.22,2260.3) 1751.79,2262.52 IC1.32 ; C2.2 1940.71,2569.34 C1.2 ; C11.2 cw(c1917.13,2320.84) 1975.21,2378.93 C4.2 cw(c1997.01,2290.8) 2043.92,2337.7 Q1.2 v1@2090.38,2332.18 ; 2010.54,2407.89 2022.46,2442.33 ; v1(1436,2399.8) 1435.18,2399.1 v1(1348.6,2325.07) v1(1375.92,2310.24) v1(1402.56,2298.1) v1(1427.85,2284.27) v1(1454.49,2271.12) v1(1482.11,2256.68) 1494.27,2245.95 1495.74,2244.64 1495.68,2244.28 1496.99,2242.96 1505.65,2235.32 1505.06,2232.01 FL1.4 FL1.5 ; FL1.5 FL1.2 1495.74,2173.87 1496.18,2172.78 1496.18,2171.69 v1(1496.19,2159.24)
  Top Layer w12: J1.10@1237.23,1610.96 J1.9@1237.23,1677.77
  Bottom Layer w6: IC4.5 1507.2,1619.06 v1(1500.94,1612.8) IC4.4 1530.47,1589.53 IC4.17 ; 1568.91,1462.05 1553.06,1477.9 1553.06,1498.04 IC4.15 1550.16,1550.16 IC4.17 ; IC4.8 1589.53,1589.53 IC4.17 ; IC5.2 IC5.7 ; J3.13 J3.14 ; v1(1873.27,2148.35) 1873.27,2178.04 C6.2
  other v1: 1460.26,1354.92 1991.81,1362.2 2138.52,1480.87 1404.58,1616.65 1671.66,1725.18 1246.15,1889.65 1920.7,1952.12 1965.94,1952.66 1638.16,2199.35 2033.68,2272.37 2090.62,2331.66 2053.02,2405.31 1946.01,2574.39
I2C_SCL: IC1.5 J3.3 R2.2 | length 872.7
  Top Layer w6: v1(1646.19,2512.08) 1648.68,2509.45 1650.39,2507.65 1649.94,2490.49 1650.04,2489.9 IC1.5
  Bottom Layer w6: v1@1651.49,2517.49 1770.61,2059.38 1771.06,2057.55 1771.1,2057.34 1787.49,1961.52 ; R2.2 1794.61,1968.64 1787.49,1961.52 ; J3.3 1851.24,1794.74 1816.79,1807.81 1813.59,1809.02 1787.49,1961.52
I2C_SDA: IC1.6 J3.1 R3.2 | length 891.5
  Top Layer w6: v1(1622.3,2493.91) IC1.6 1634.99,2465.35 1634.65,2467.17 IC1.6@1631.71,2470.1
  Bottom Layer w6: v1@1627.49,2495.58 1715.26,2222.56 1715.72,2221.03 1715.75,2220.94 1723.37,2192.41 1748.3,2097.02 1748.36,2096.79 1792.82,1847.6 ; R3.2 1769.56,1823.16 1792.82,1846.41 1792.82,1847.6 ; J3.1 1851.24,1778.99 1808.32,1784.56 1803.96,1785.13 1792.82,1847.6
LDO_RESET: IC5.4
LED_CLK: IC1.10 J3.5 | length 874.5
  Top Layer w6: v1(1487.62,2385.95) 1487.62,2403.59 1516.75,2432.73 1518.02,2433.18 1543.6,2442.32 1549.32,2442.32 1553.08,2438.57 IC1.10 ; v1(1747.22,1956.47) 1750.67,1959.92 1763.89,1959.92 1784.75,1939.05 1830.65,1829.91 v1(1832.64,1829.1)
  Bottom Layer w6: v1(1487.62,2385.95) 1583.89,2317.86 cw(c1512.42,2216.53) 1599.43,2304.88 1641.19,2263.8 1665.21,2240.28 1677.66,2228.03 1691.72,2213.97 1699.37,2189.01 1699.38,2187.52 1700.46,2048.37 1700.46,2035.15 1747.22,1966.15 v1(1747.22,1956.47) ; v1(1832.64,1829.1) 1851.24,1810.48 J3.5
LED_DATA: IC1.16 J3.7 | length 907.9
  Top Layer w6: v1(1484.31,2348.37) 1497.37,2335.31 ; 1497.38,2335.31 cw(c1493.1,2331.1) 1497.68,2334.97 1513.28,2316.76 ccw(c1520.11,2322.62) 1521.68,2313.75 IC1.16 ; v1(1754.59,1924.82) 1790.03,1828.68 1808.89,1809.82 ccw(c1840.21,1841.13) 1840.21,1796.84 1870.45,1796.84 ccw(c1870.45,1855.16) v1(1911.68,1813.92)
  Bottom Layer w6: v1(1484.31,2348.37) 1553.77,2320.62 ; 1553.81,2320.6 cw(c1512.42,2216.53) 1591.11,2296.23 1632.75,2255.26 1634.5,2253.54 1660.24,2228.28 1672.69,2216.03 1679.72,2209 1687.37,2184.04 1687.37,2062.16 ccw(c1693.37,2062.16) 1687.38,2061.94 1688.54,2030.91 ccw(c1794.66,2034.93) 1719.56,1959.84 ; 1719.59,1959.81 cw(c1715.37,1955.55) 1720.69,1958.32 1726.22,1947.77 1738.53,1935.47 v1(1754.59,1924.82) ; J3.7 1875.3,1821.79 1894.92,1821.79 1902.79,1813.92 v1(1911.68,1813.92)
NetANT1_1: ANT1.1 FL1.1 | length 87.5
  Top Layer w6: FL1.1@1465,2175 1466.38,2179.03 FL1.1
  Top Layer w23: ANT1.1@1390.14,2174.58 FL1.1@1465,2175
  Top Layer w25: ANT1.1@1385,2174.55 ANT1.1@1390.14,2174.58
NetC8_1: C8.1 D1.2 P1.2 Q1.3 | length 504.8
  Top Layer w6: D1.2@2307.91,2247.09 D1.2 2316.78,2221.78 2223.13,2221.78 2192.93,2251.98 2192.93,2274.37 Q1.3 cw(c2244.7,2330.17) 2168.63,2330.17 C8.1 cw(c2228.16,2334.93) 2228.16,2419.1 2281.08,2419.1 ccw(c2281.08,2474.69) 2320.39,2435.38 P1.2
NetIC2_4: IC2.4 J2.3 | length 429.7
  Bottom Layer w6: J2.3 1301.69,1827.45 1301.59,1827.35 1299.75,1825.51 1299.34,1766.46 1299.32,1763.89 1341.32,1723.27 1343.65,1723.21 1343.73,1723.21 1346.3,1723.21 1376.93,1725.33 1430.66,1768.8 1447.59,1779.1 1448.45,1779.42 1492.36,1795.78 1493.87,1795.56 IC2.4
NetIC2_6: IC2.6 J2.1 | length 375.3
  Bottom Layer w6: J2.1 1349.03,1834.99 1346.56,1834.73 1321.94,1804.28 1321.94,1766.04 1353.43,1737.33 1371.96,1737.33 1373.88,1738.81 1425.69,1780.8 1532.24,1860.6 1533.85,1861.84 1540.52,1866.97 1543.68,1867.03 1551.65,1863.49 IC2.6
NetIC4_1: IC4.1 R7.2 R8.2 | length 125.7
  Bottom Layer w6: R8.2 1500.95,1448.38 ; IC4.1 1500.95,1448.38 ; R7.2 1500.95,1448.38
NetIC4_9: IC4.9 LED1.1 | length 466.5
  Top Layer w6: LED1.1 1637.98,1464.58 1637.98,1612.23 v1(1635.02,1615.2)
  Bottom Layer w6: IC4.9 1628.9,1589.53 1631.8,1592.43 1631.8,1611.99 v1(1635.02,1615.2)
NetIC4_12: IC4.12 R9.1 | length 70.8
  Bottom Layer w6: IC4.12 1663.53,1530.47 1681.59,1512.41 R9.1
NetIC4_16: IC4.16 R6.2 | length 92.9
  Bottom Layer w6: IC4.16 1530.47,1477.75 ccw(c1536.58,1477.75) 1532.26,1473.44 1540.84,1464.93 cw(c1534.53,1458.51) 1540.94,1464.83 1556.4,1449.29 cw(c1528.72,1421.62) R6.2
NetLED1_2: LED1.2 R10.1 | length 495.8
  Top Layer w6: LED1.2 1509.89,1231.02 1522.89,1244.02 v1(1747.27,1244.02)
  Bottom Layer w6: v1(1747.27,1244.02) R10.1
NetQ1_1: Q1.1 R4.1 | length 160.2
  Top Layer w6: Q1.1 2133.96,2360.74 v1(2133.96,2251.56)
  Bottom Layer w6: R4.1 cw(c2094.69,2246.56) 2094.69,2251.56 v1(2133.96,2251.56)
NRST: C7.1 IC1.7 J1.4 | length 1151.4
  Top Layer w6: J1.4 v1(1479.22,1689.19) 1512.02,1722 ccw(c1441.31,1792.71) 1541.31,1792.71 1541.31,1848.61 1541.31,1941.23 1667.69,2067.61 1719.69,2067.61 v1(1721.3,2069.21) ; v1@1604.15,2481.93 IC1.7
  Bottom Layer w6: v1(1479.22,1689.19) ccw(c1484.57,1694.55) 1484.57,1686.98 C7.1 ; v1(1593.69,2480.61) 1606.91,2474.66 1703.19,2220.43 1703.72,2218.94 1703.78,2218.71 1711.37,2190.81 1719.38,2070.58 1719.39,2070.38 1720.55,2069.21 v1(1721.3,2069.21)
OLED_RST: IC1.28 J3.2 | length 784.7
  Top Layer w6: IC1.28 1697.8,2180.86 1755.81,2122.85 v1(1901.73,2122.85) ; v1(2047.51,1764.9) 2047.51,1767.81 2066.23,1786.53 v1(2066.23,1915.65)
  Bottom Layer w6: v1(1901.73,2122.85) 1933.71,2090.87 1933.71,2073.19 1962.24,2044.66 2068.78,2044.66 2072.3,2041.14 2072.3,1921.72 v1(2066.23,1915.65) ; J3.2 2032.74,1776.77 2044.6,1764.9 v1(2047.51,1764.9)
RCC_OSC32_IN: C1.1 IC1.2 Y1.1 | length 253.9
  Top Layer w6: IC1.2 1704.3,2509.53 1704.3,2515.25 1708.06,2519.01 1722.01,2525.52 1766.25,2527.64 1769.15,2527.64 1771.52,2527.31 1772.93,2525.92 1799.61,2499.76 cw(c1795.43,2495.46) 1799.69,2499.69 ccw(c1848.04,2548.02) Y1.1 1892.65,2524.26 cw(c1894.76,2522.15) C1.1
RCC_OSC32_OUT: C2.1 IC1.3 Y1.2 | length 236.6
  Top Layer w6: IC1.3 1686.46,2502.41 1686.46,2506.93 1689.11,2512.31 1692.3,2520.22 1703.09,2531.01 1719.35,2537.52 1721,2537.71 1721.39,2537.83 1803.35,2563.03 1804.52,2565.22 Y1.2 ccw(c1812.92,2575.34) 1812.92,2566.17 C2.1
RCC_OSC_IN: IC1.25 Y2.3 | length 170.7
  Top Layer w6: Y2.3 1525.87,2067.29 ccw(c1525.87,2167.29) 1596.58,2096.58 1646.86,2146.86 1646.86,2158.56 IC1.25
RCC_OSC_OUT: IC1.24 Y2.1 | length 89.7
  Top Layer w6: Y2.1 1546.16,2149 ; 1546.18,2149.02 cw(c1550.38,2144.74) 1548.14,2150.3 IC1.24
RF_OUT: FL1.3 IC1.21 | length 85.8
  Top Layer w6: IC1.21@1576.82,2222.76 ccw(c1574.52,2228.31) IC1.21@1578.73,2224.02 ; IC1.21@1578.74,2224.04 IC1.21
  Top Layer w11: FL1.3 IC1.21
SYS_SWCLK: IC1.41 J1.2 | length 1457.4
  Top Layer w6: J1.2 v1(1435,1720) ; v1@1569.89,1733.87 1682.17,1846.15 1682.17,1899.81 1664.7,1917.28 1664.7,1958.06 1704.36,1997.71 1850.59,1997.71 1882.42,2029.54 2022.16,2029.54 2068.8,2076.18 v1(2069.57,2076.18) ; IC1.41 1824.28,2360.64 1847.65,2384.02 v1(1847.65,2385.55)
  Bottom Layer w6: v1(1435,1720) 1430.34,1720 1428.32,1722.03 1447.33,1722.03 1466.3,1741 1566.47,1741 v1(1577.31,1730.16) ; v1(1847.65,2385.55) 1850.02,2385.55 1851.27,2384.31 1871.02,2384.31 1914.37,2340.96 1927.73,2310.4 1951.33,2172.13 1951.71,2169.9 2032.7,2104.41 2064.3,2084.67 2064.35,2084.64 2067.86,2081.13 2069.61,2079.38 2069.61,2076.29 v1(2069.57,2076.18)
SYS_SWDIO: IC1.39 J1.3 | length 1341.1
  Top Layer w6: J1.3 1339.66,1671.23 1463.27,1705.44 1471.45,1710.49 1473.15,1712.19 v1(1475,1720) ; v1@1540.66,1716.24 1540.66,1727.62 1670.17,1857.12 1670.17,1894.84 1652.7,1912.31 1652.7,1963.03 1700.12,2010.44 1846.35,2010.44 1877.45,2041.54 2000.6,2041.54 v1(2036.4,2077.34) ; IC1.39 ccw(c1837.22,2349.61) 1854.64,2332.18 v1(1868.89,2346.43)
  Bottom Layer w6: v1(1475,1720) 1478.76,1716.24 v1(1541.13,1716.24) ; v1(1868.89,2346.43) 1888.17,2343.95 cw(c1885.54,2323.11) 1904.73,2331.64 1914.85,2309.03 cw(c1884.77,2295.45) 1916.31,2305.16 cw(c1884.77,2295.45) 1916.45,2304.71 1937.52,2164.19 1939.12,2162.59 2034.55,2083.94 2034.77,2083.76 2036.73,2081.8 2036.73,2077.72 v1(2036.4,2077.34)
USB_DN: IC1.37 IC2.1 | length 810.9
  Top Layer w6: v1(1637.17,1876.23) 1618.2,1895.2 1618.2,1975.05 1679.36,2036.21 1812.87,2036.21 1855.31,2078.65 v1(1969.37,2078.65) ; IC1.37 1856.77,2292.19 v1(1871.51,2292.19)
  Bottom Layer w6: v1(1637.17,1876.23) 1637.17,1858.15 1649.9,1845.42 IC2.1 ; v1(1871.51,2292.19) cw(c1871.51,2259.36) 1893,2284.18 cw(c1871.51,2259.36) 1894.73,2282.57 1912.91,2151.7 1913.18,2149.71 1914.61,2148.29 1967.96,2094.93 1967.96,2080.06 v1(1969.37,2078.65)
USB_DP: IC1.38 IC2.3 | length 1030.5
  Top Layer w6: v1(1602.81,1839.27) 1629.91,1839.27 1658.17,1867.53 1658.17,1889.87 1635.27,1912.77 1635.27,1975.16 1684.33,2024.21 1843.15,2024.21 1876.59,2057.65 1984.68,2057.65 v1(2005.17,2078.14) ; IC1.38 1846.93,2307.12 ccw(c1846.93,2313.12) 1849.29,2307.6 v1@1885.54,2323.11
  Bottom Layer w6: v1(1602.81,1839.27) 1602.81,1781.74 1606.81,1777.75 1631.81,1777.75 IC2.3 ; v1@1887.45,2315.35 1887.05,2316.97 1885.54,2323.11 1898.33,2310.33 ; 1898.34,2310.32 cw(c1894.09,2306.08) 1899.68,2308.26 1906.03,2292.17 cw(c1900.46,2289.94) 1906.38,2290.9 ; 1906.39,2290.86 1926.46,2156.35 1927.65,2155.17 v1@2004.67,2078.14
  other v1: 1886.6,2320.44
VBAT: B1.Pos C16.1 IC4.2 IC4.3 J3.9 J3.10 | length 1847.6
  Top Layer w6: B1.Pos@2455,2117.52 B1.Pos
  Top Layer w12: v1(1437.84,1636.13) 1440.14,1638.42 1448.62,1638.42 1450.57,1640.37 1572.88,1640.37 1617.48,1684.96 2013.93,1684.96 2017.66,1681.24 v1(2020.9,1681.24) 2020.9,1684.49 2023.51,1687.09 2023.51,1822.78 2042.95,1842.21 v1(2043.56,1842.21) ; v1(2189.71,1854.19) 2191.67,1854.19 2455,2117.52 B1.Pos
  Bottom Layer w6: v1@1437.84,1631.31 v1(1437.84,1636.13) ; C16.1@1452.29,1558.77 C16.1 cw(c1456.07,1555.81) C16.1@1456.07,1560 ; J3.9 J3.10 2041.11,1839.76 v1(2043.56,1842.21)
  Bottom Layer w12: v1@1437.84,1631.31 1430.15,1623.61 1430.15,1580.92 C16.1@1452.29,1558.77 ; C16.1@1456.07,1560 1500.94,1560 ; IC4.2 1500.94,1560 ; IC4.3 1500.94,1560 ; v1(2020.9,1681.24) 2189.71,1850.04 v1(2189.71,1854.19)
VDD: C3.1 C5.1 C6.1 C8.2 C9.1 C10.1 C11.1 C14.1 C15.1 D1.1 IC1.1 IC1.8 IC1.20 IC1.23 IC1.34 IC1.35 IC1.40 IC1.48 IC5.6 J2.2 J3.11 J3.12 P1.1 R2.1 R3.1 | length 5233.9
  Top Layer w6: v1(1405,2335) C9.1 1521.82,2253.18 1532.93,2242.07 ccw(c1550,2259.14) 1550,2235 ccw(c1550,2267.69) 1573.12,2244.58 IC1.20 ; v1(1478.08,1861.54) 1478.08,1913.13 1548.08,1983.13 ; v1(1484.52,2042.08) 1543.47,1983.13 1548.08,1983.13 ; C5.1 C5.1@1568.43,2485.69 ; v1(1563.15,2179.12) 1592.61,2191.81 cw(c1595,2186.31) 1595,2192.31 IC1.23 ; v1(1567.37,2496.92) 1566.56,2495.01 1565.59,2492.72 C5.1@1568.43,2485.69 ; v1@1576.32,2493.57 C5.1@1568.43,2485.69 ; IC1.8 1598.44,2441.64 1596.38,2442.52 1594.26,2443.42 1588.76,2455.2 1585,2458.96 1580.78,2458.96 1578.16,2461.58 1570.06,2481.65 C5.1@1568.43,2485.69 ; v1(1632.95,2068) 1548.08,1983.13 ; IC1.1 1740.25,2498.86 ccw(c1740.25,2510.37) v1(1748.39,2502.23) ccw(c1755.02,2502.23) v1@1750.32,2497.55 ; v1@1750.33,2497.54 IC1.48 ; IC1.34 ccw(c1804.85,2259) 1821.1,2242.75 IC1.35 1835.35,2229.22 ccw(c1842.25,2234.99) 1846.05,2226.84 1856.75,2231.83 ccw(c1852.95,2239.99) 1860.75,2235.5 v1(1872.01,2255.01) ; IC1.40 1834.6,2342.8 1878.81,2387.01 C11.1 1893.17,2412.77 1896.92,2416.53 1920.11,2427.34 1925.14,2427.34 1925.83,2427.34 1934.04,2425.41 1937.31,2422.59 1938.74,2422.25 v1@1960.38,2417.16 ; P1.1 P1.1@2285.35,2363.05
  Top Layer w12: v1(1698.53,1949.34) 1700.83,1951.64 1700.83,1960.12 1701.33,1960.62 1701.33,1969.28 1712.52,1980.47 1784.49,1980.47 ; v1(1833.11,1932.16) 1832.8,1932.16 1784.49,1980.47 ; v1(2027.35,2470.81) 2245.31,2470.81 v1@2271.02,2445.11 ; v1(2095.07,2158.73) 2096.03,2157.78 2096.03,2052.99 2082.96,2039.92 2053.75,2039.92 2025.51,2011.68 1892.06,2011.68 1860.85,1980.47 1784.49,1980.47 ; C8.2 2201.59,2375.33 2247.05,2375.33 2258.99,2363.4 P1.1 2239.51,2317.91 v1(2239.51,2253.24) ; P1.1@2285.35,2363.05 ccw(c2356.06,2433.76) 2356.06,2333.76 D1.1
  Bottom Layer w6: J2.2 v1(1478.08,1861.54) ; v1(1484.52,2042.08) 1560.97,2148.57 1562.02,2150.04 v1(1563.15,2179.12) 1588.81,2179.12 ccw(c1588.81,2191.93) C10.1 ccw(c1593.65,2187.13) 1598.13,2183.14 1616.39,2203.67 ccw(c1609.68,2209.67) 1618.68,2209.67 1618.68,2231.67 ccw(c1609.68,2231.67) 1615.32,2238.68 1600.25,2250.87 1599.82,2251.22 1570.04,2280.95 1499.26,2280.95 v1(1405,2335) 1512.64,2442.64 v1(1567.37,2496.92) 1663.95,2551.24 1705.29,2556.13 1785.92,2523.58 C3.1 1779.3,2489.42 cw(c1779.3,2533.14) v1(1748.39,2502.23) ; R2.1@1856.87,1967.83 R2.1 ; C6.1@1866,2208.56 C6.1 ; C15.1 1868.6,1470.13 C15.1@1868.78,1470.31 ; v1(1872.01,2255.01) cw(c1867.21,2250.21) v1@1874,2250.21 ; J3.11 J3.12 ; v1(2271.4,2445.49) 2271.4,2440.62 2277.19,2434.82 ; P1.1@2277.19,2371.21 P1.1
  Bottom Layer w9: 1833.46,1944.43 1833.46,1871.41 1849.36,1855.51 J3.11
  Bottom Layer w10: 1833.46,1944.43 R2.1@1856.87,1967.83 ; R2.1 1856.81,2103.12 1837.66,2122.27 1837.66,2198.56 1847.66,2208.56 C6.1@1866,2208.56 ; C15.1@1868.78,1470.31 IC5.6 ; C6.1 v1@1874,2250.21
  Bottom Layer w12: v1(1632.95,2068) 1632.95,2066.63 1661.27,2038.31 1661.27,1984.87 1732.07,1914.07 1732.07,1819.87 1761.57,1790.37 1763.75,1790.37 R3.1 1768.75,1748.07 1838.75,1678.07 1894.58,1678.07 1927.49,1645.16 1927.49,1529.02 C15.1@1868.78,1470.31 ; v1(1969.98,2412.77) v1@2027.3,2470.09 ; v1(2095.07,2158.73) 2095.07,2161.98 2099.59,2166.5 2099.59,2172.64 2178.88,2251.94 2238.21,2251.94 v1(2239.51,2253.24) ; P1.1@2277.19,2371.21 2277.19,2434.82
VFBSMPS: C4.1 IC1.31 L1.2 | length 315.2
  Top Layer w6: IC1.31 1767.41,2191.85 ccw(c1771.99,2195.73) 1773.23,2189.86 1810.9,2197.81 ccw(c1806.56,2218.36) 1812.03,2198.08 cw(c1813.56,2192.28) 1812.88,2198.24 1846.17,2202.23 ccw(c1842.25,2234.99) 1856.19,2205.09 1866.93,2210.09 ccw(c1852.95,2239.99) 1868.5,2210.88 1883.74,2219.02 ccw(c1875.26,2234.9) 1884.85,2219.67 1916.41,2239.54 ccw(c1913.23,2244.63) 1917.47,2240.38 L1.2 1990.75,2313.66 cw(c2012.99,2291.43) C4.1
VIB_PWM: IC1.17 R4.2 | length 889
  Top Layer w6: v1(1485.42,2316.53) 1501.66,2300.29 ccw(c1517.26,2315.89) 1517.26,2293.83 1536.08,2293.83 ccw(c1536.08,2312.69) IC1.17 ; v1(1655.29,2096.7) 1923.6,2096.7 ccw(c1923.6,2196.7) 1994.31,2125.99 v1(2052.69,2184.37)
  Bottom Layer w6: v1(1485.42,2316.53) 1512.42,2316.53 cw(c1512.42,2216.53) 1583.13,2287.25 1665.93,2205.79 1667.72,2204.03 1667.72,2109.13 v1(1655.29,2096.7) ; v1(2052.69,2184.37) ccw(c2052.69,2209.79) 2070.66,2191.81 R4.2
VLXSMPS: IC1.33 L1.1 | length 235.5
  Top Layer w6: IC1.33 1799.66,2212.58 ccw(c1806.56,2218.36) 1809.04,2209.7 cw(c1810.66,2203.93) 1809.33,2209.78 1809.55,2209.83 cw(c1813.59,2192.29) 1811.5,2210.17 1844.74,2214.14 ccw(c1842.25,2234.99) 1851.12,2215.96 1861.83,2220.95 ccw(c1852.95,2239.99) 1862.84,2221.46 1878.09,2229.6 ccw(c1875.26,2234.9) 1879.46,2230.61 ; 1879.48,2230.63 1881.23,2232.38 ccw(c1810.52,2303.09) 1910.52,2303.09 1910.52,2305.39 cw(c1964.15,2305.39) 1926.23,2343.32 L1.1
VSYS: C17.1 IC4.10 IC4.11 IC5.1 IC5.3 R10.2 | length 304.4
  Bottom Layer w6: IC4.11 1619.06,1560 IC4.10 ; C17.1 C17.1@1683.21,1561.02 ; IC5.3@1744.76,1634.65 IC5.3 ; R10.2 IC5.1
  Bottom Layer w10: 1619.06,1560 C17.1 IC5.1 ; C17.1@1683.21,1561.02 1715.06,1592.87 1715.06,1604.94 IC5.3@1744.76,1634.65
pads on no net: ANT1.SP1 ANT1.SP2 ANT1.SP3 IC1.9 IC1.11 IC1.12 IC1.13 IC1.14 IC1.15 IC1.18 IC1.19 IC1.26 IC1.27 IC1.29 IC1.30 IC1.36 IC1.42 IC1.46 IC1.47 IC4.7 IC4.14 IC5.5 J2.7 J2.8 J2.9 J3.MP1 J3.MP2 J3.MP3 J3.MP4 Y2.2 Y2.4

## Polygon pours and split planes (outlines as drawn)
GND on Top Layer "GND_L01_P012" (solid, pour order 12): 2047.63,2431.73 2015.84,2415.84 2030.41,2365.5 2038.36,2309.86 2003.92,2286.01 1999.94,2254.22 2055.58,2239.65 2066.18,2274.09 2048.96,2297.94 2092.67,2332.38 2088.7,2434.38
GND on Top Layer "GND_L01_P011" (solid, pour order 11): 1975.43,1405.73 1948.28,1378.57 1981.39,1314.99 2043.66,1325.58 2206.6,1484.55 2181.43,1556.09 2060.88,1536.22
GND on Top Layer "GND_L01_P010" (solid, pour order 10): 1632.99,1757.45 1935.03,1770.69 1957.55,1863.42 1876.74,1962.78 1921.78,1990.6 2026.43,1981.32 1985.37,1709.76 1693.93,1701.81 1630.34,1701.81
GND on Top Layer "GND_L01_P008" (solid, pour order 8): 1444.31,1384.63 1424.01,1344.04 1464.6,1315.28 1511.96,1374.48
GND on Top Layer "GND_L01_P006" (solid, pour order 6): 1200.75,1929.24 1287.01,1929.24 1266.72,1848.05 1197.37,1870.04
GND on Top Layer "top gnd" (solid, remove dead copper, pour order 0): 1937.65,1036.61 cw(c1937.65,1824.01) 1150.25,1824.01 cw(c1937.65,1824.01) 1937.65,2611.41 cw(c1937.65,1824.01) 2725.05,1824.01 cw(c1937.65,1824.01)
GND on Top Layer "GND_L01_P004" (solid, pour order 4): 1318.74,2337.14 1482.11,2256.68 1505.73,2235.82 1521.82,2253.18 1414.34,2445.34
GND on Top Layer "GND_L01_P003" (solid, pour order 3): 1365.84,1997.64 1376.57,1998.57 1441.43,2119.8 1458.54,2144.09 1526.66,2172.61 1463.62,2094.43 1393.21,1981.57
GND on Top Layer "GND_L01_P002" (solid, pour order 2): 1163.21,2121.69 1144.56,2081.59 1351.62,1982.25 1363.71,2016.56
GND on Bottom Layer "GND_L02_P018" (solid, pour order 18): 2041.93,2448.03 1995.98,2394.93 1989.85,2256.57 2049.08,2213.69 2080.22,2281.59 2148.64,2312.22 2141.49,2390.85 2079.71,2439.86
GND on Bottom Layer "GND_L02_P017" (solid, pour order 17): 2036.31,1492.7 1978.7,1402.54 1948.65,1380 1983.71,1322.4 2048.83,1329.91 2201.59,1480.18 2171.54,1560.32 2056.34,1535.27
GND on Bottom Layer "GND_L02_P016" (solid, pour order 16): 1416.41,1649.83 1418.02,1574.12 1358.41,1580.56 1361.63,1665.94
GND on Bottom Layer "GND_L02_P015" (solid, pour order 15): 1680.6,1760.99 1640.33,1738.44 1641.94,1683.66 1728.93,1711.05
GND on Bottom Layer "GND_L02_P014" (solid, pour order 14): 1447.01,1388.86 1429.29,1348.59 1458.29,1308.31 1506.62,1329.25 1488.9,1380.8
GND on Bottom Layer "GND_L02_P013" (solid, pour order 13): 1215.04,1931.75 1198.93,1867.31 1247.26,1854.42 1298.81,1905.98
GND on Bottom Layer "bot gnd" (solid, remove dead copper, pour order 1): 1937.65,1036.61 cw(c1937.65,1824.01) 1150.25,1824.01 cw(c1937.65,1824.01) 1937.65,2611.41 cw(c1937.65,1824.01) 2725.05,1824.01 cw(c1937.65,1824.01)
GND on Bottom Layer "GND_L02_P005" (solid, pour order 5): 1143.07,2078.96 1377.49,1955.82 1551.89,2160.81 1540.38,2260.06 1313.51,2390.07

## Keep-outs
Keep-Out Layer:
  the board outline again, w2

## Other copper
Top Layer:
  region net GND: 1213.51,1663 1222.59,1616.84 1259.29,1624.4 1245.67,1673.21
  region net GND: 1385.54,1639.29 1399.96,1584.6 1433.93,1610 1418.99,1629.97 1420.34,1645.73
  pour cut-out: 1185.71,2109.42 1368.46,2012.18 1435.68,2134.88 1496.19,2159.24 1526.66,2172.61 1507.96,2229.09 1305.73,2331.52

## Silkscreen, mask and mechanical layers (free items; w line width, h text height)
Top Overlay:
  lines w10: 2041.91,2613.94 2041.91,2443.24 2066.09,2419.05 2137.22,2419.05 2223.99,2572.69
  text "VIB" at 2074.67,2525.78 h30
  text "MTR" at 2074.67,2474.57 h30
Bottom Overlay:
  text "Watch 1v1" at 2654.85,1674.19 h60
  text "Main Board" at 2649.23,1598.39 h60
  text "dramsay" at 2531.42,1418.67 h60
  text "mit media lab" at 2386.8,1224.48 h60
  text "resenv 4/20" at 2235.61,1134.44 h60